# Altium PCB PCB1R.PcbDoc
Units mm, origin at the board's own origin, x right, y up, seen from the top; angles counter-clockwise.
Board outline 32 x 84 mm, 2 copper layers (Top Layer, Bottom Layer); 32 components, 12 nets, 73 pads, 12 vias.
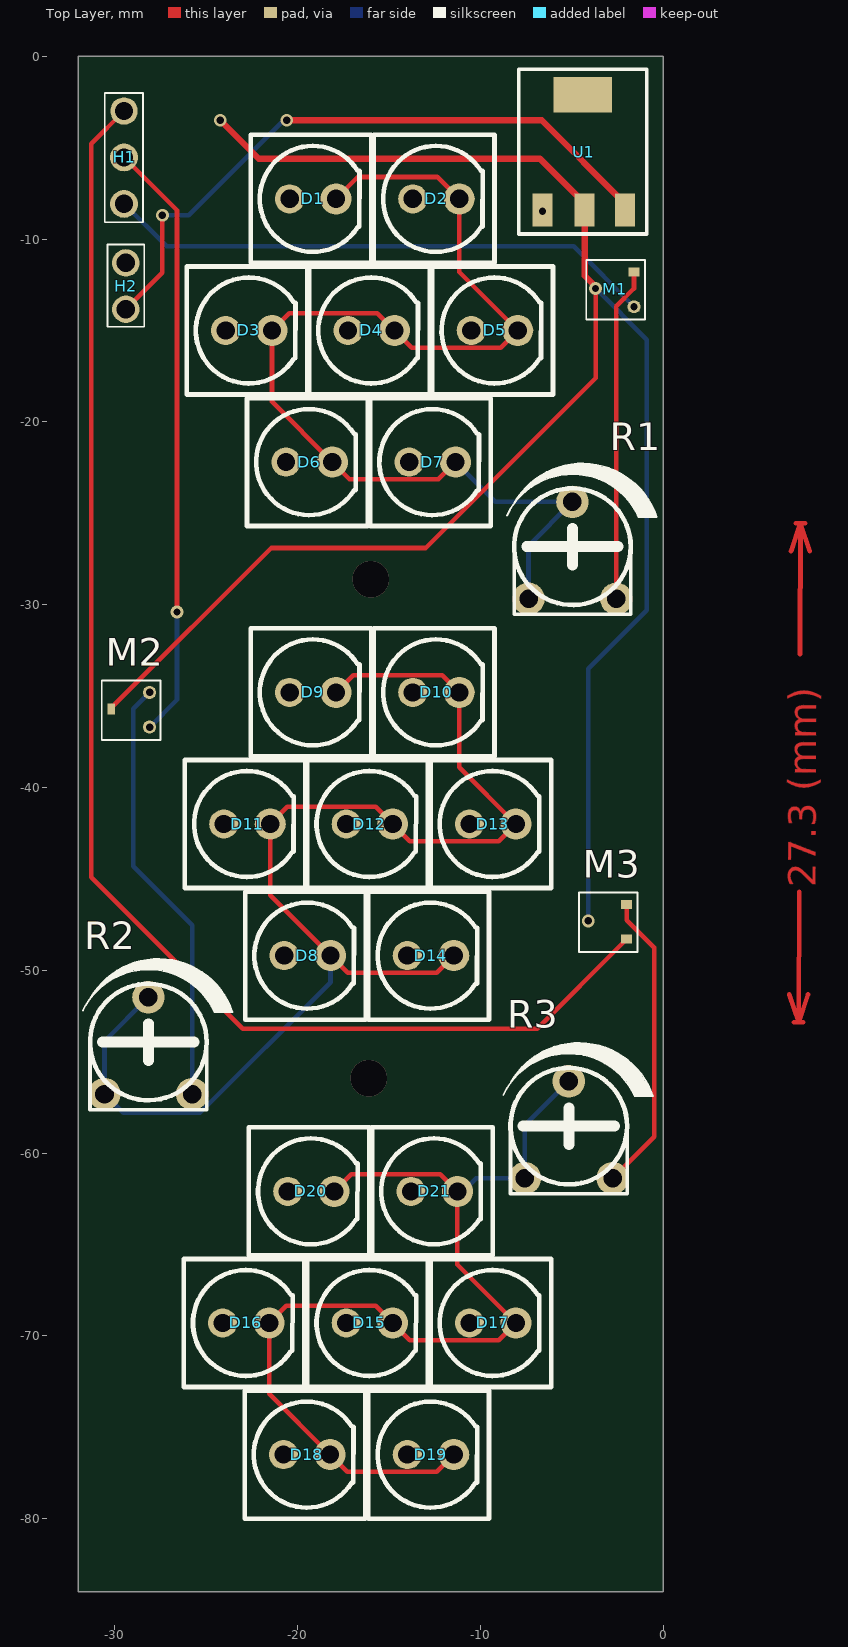
[diagram p0: Top Layer view]
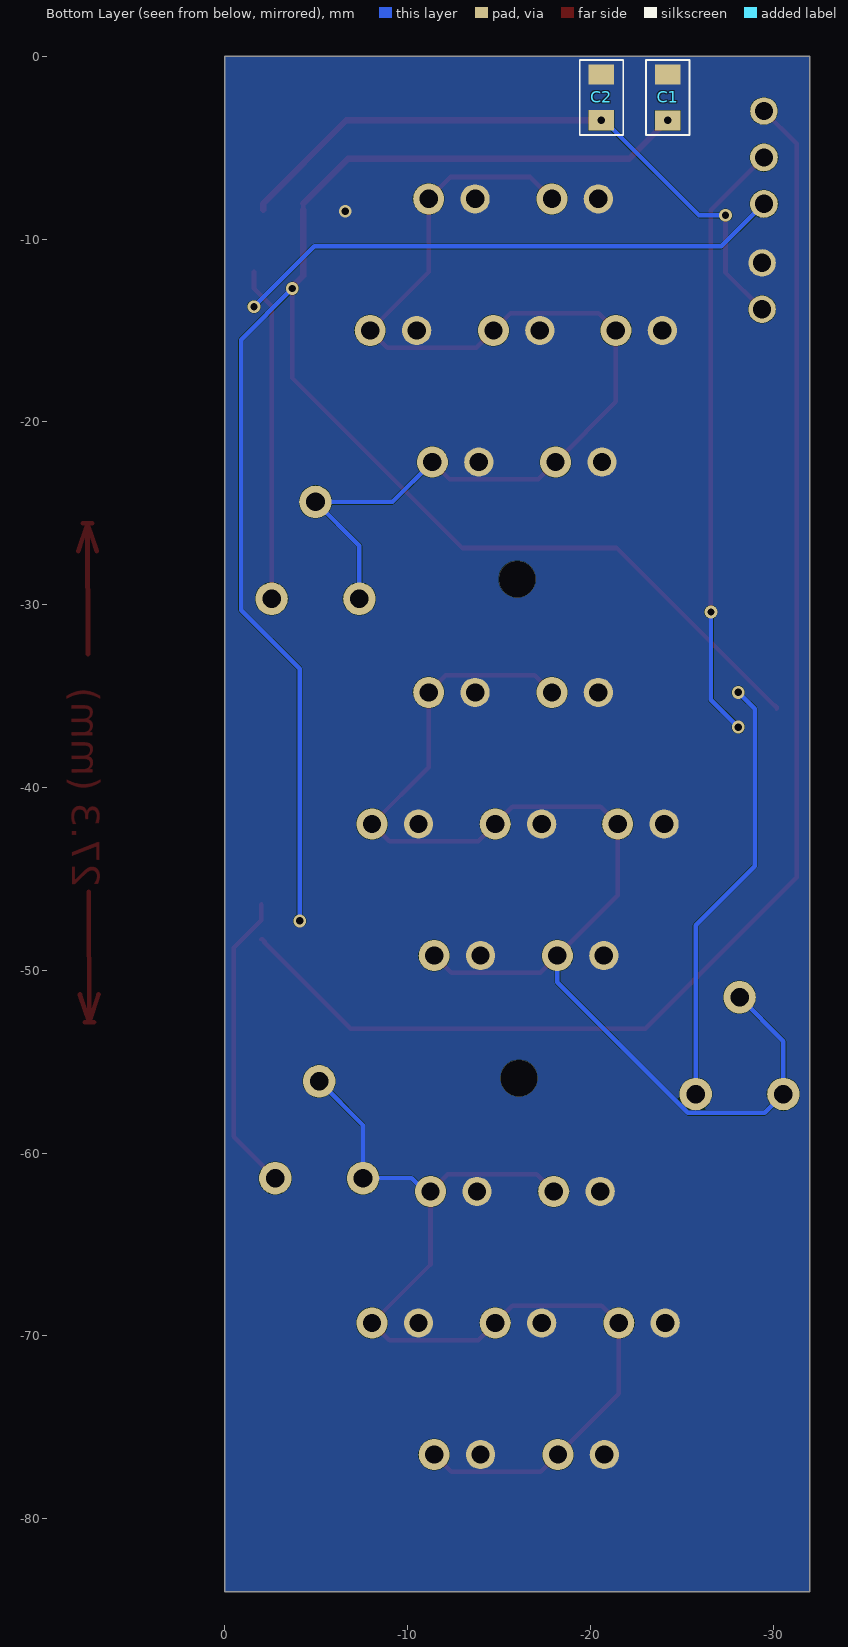
[diagram p1: Bottom Layer view, seen from below]
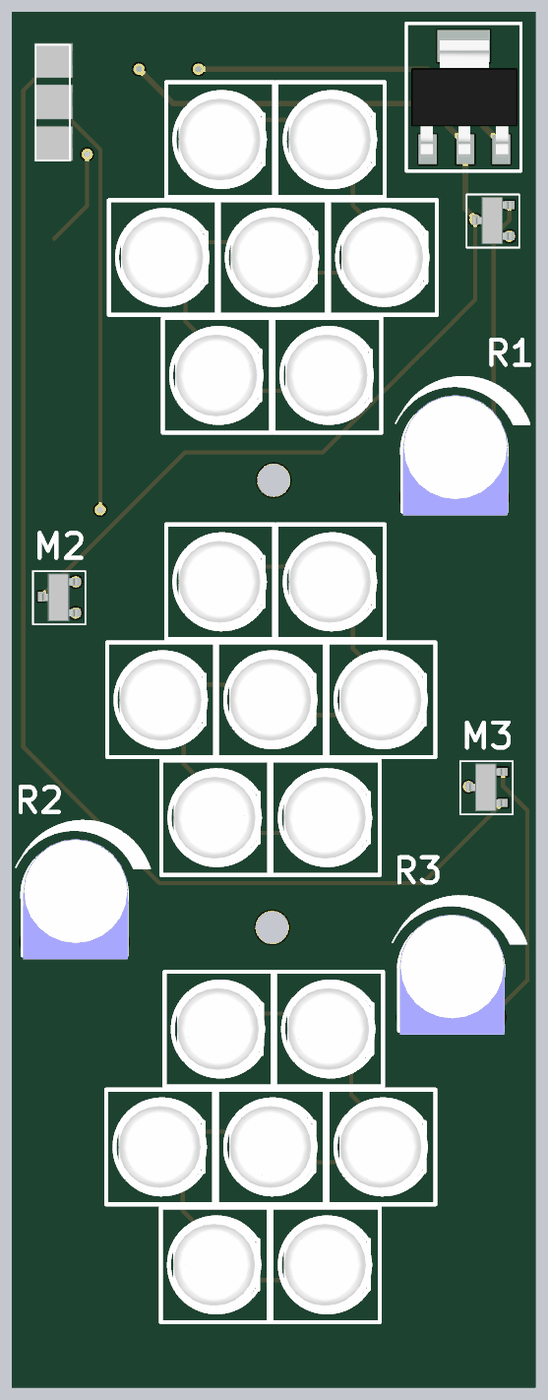
[diagram p2: 3D render of the assembled board from above, using the file's embedded part models]

## Layer stack, top to bottom
Top Solder: solder mask 0.0102, Solder Resist, Dk 3.5
Top Layer: signal copper 0.0356
Dielectric 1: dielectric 0.32, FR-4, Dk 4.8
Bottom Layer: signal copper 0.0356
Bottom Solder: solder mask 0.0102, Solder Resist, Dk 3.5

## Board outline
-32,-84 0,-84 0,0 -32,0

## Design rules (kind name [scope] priority, off if disabled: settings)
Clearance [All] p1: gap=0.01 ignorepadtopadclearanceinfootprint=FALSE
PolygonConnect [All] p1: connectstyle=Direct reliefconductorwidth=0.254 reliefentries=4 polygonreliefangle="90 Angle" airgapwidth=0.254
RoutingVias [All] p1: holewidth=2 width=1.27 viastyle="Through Hole" minholewidth=0.01 minwidth=0.01 maxholewidth=2 maxwidth=2
SilkToSolderMaskClearance [IsPad] p1: minsilkscreentomaskgap=0 clearancetoexposedcopper=TRUE
SolderMaskExpansion [All] p1: expansion=0.102 istentingtop=FALSE
Width [All] p1: maxlimit=0.4 minlimit=0.254 preferedwidth=0.254
29 further rules are at their usual default settings.

## Components (designator, comment, footprint, x,y, rotation, side; value= is the part's Value field where it differs from the comment)
C1 "Capacitor" Capacitor -24.231,-2.303 r270 bottom
C2 "Capacitor" Capacitor -20.6,-2.3 r270 bottom
D1 "LED" LED -19.07,-7.3 r0 top
D2 "LED" LED -12.33,-7.3 r0 top
D3 "LED" LED -22.57,-14.5 r0 top
D4 "LED" LED -15.87,-14.5 r0 top
D5 "LED" LED -9.13,-14.5 r0 top
D6 "LED" LED -19.27,-21.7 r0 top
D7 "LED" LED -12.53,-21.7 r0 top
D8 "LED" LED -19.37,-48.7 r0 top
D9 "LED" LED -19.07,-34.3 r0 top
D10 "LED" LED -12.33,-34.3 r0 top
D11 "LED" LED -22.67,-41.5 r0 top
D12 "LED" LED -15.97,-41.5 r0 top
D13 "LED" LED -9.23,-41.5 r0 top
D14 "LED" LED -12.63,-48.7 r0 top
D15 "LED" LED -15.97,-68.8 r0 top
D16 "LED" LED -22.73,-68.8 r0 top
D17 "LED" LED -9.23,-68.8 r0 top
D18 "LED" LED -19.4,-76 r0 top
D19 "LED" LED -12.63,-76 r0 top
D20 "LED" LED -19.17,-61.6 r0 top
D21 "LED" LED -12.43,-61.6 r0 top
H1 "PinHeader3" "Header x3" -27.8,-3.412 r0 top
H2 "PinHeader2" "Header x2" -193,-98.9 r0 top
M1 "Mosfet" Mosfet -9.9,-11.5 r0 top
M2 "Mosfet" Mosfet -36.4,-34.5 r0 top
M3 "Mosfet" Mosfet -10.3,-46.1 r0 top
R1 "Potetiometer" Potentiometer -4.9,-27.2 r0 top
R2 "Potetiometer" Potentiometer -28.1,-54.3 r0 top
R3 "Potetiometer" Potentiometer -5.1,-58.9 r0 top
U1 "Regulator" SOT-223 -2.1,-2.1 r270 top

## Footprints (in the part's own frame and the unit in brackets; to place one, negate y for a bottom-side part, rotate by r counter-clockwise, add the part's x,y. Pads: shape width x height; smd on the part's side, far side on the other; paste and mask are expansions set on the pad)
Capacitor [mm]
  rect 1.1x1.4 smd: 1(-1.3,0) 2(1.2,0)
  silkscreen extent -2.1,-1.17 2,1.2, body extent -1.1,-0.65 0.9,0.65, height 0.77
"Header x2" [mm]
  round 1.5 hole 1: 1(163.6,87.6) 2(163.6,85.06)
  silkscreen extent 162.59,84.1 164.61,88.6, body extent 162.3,83.76 164.8,88.84, height 5.38
"Header x3" [mm]
  round 1.5 hole 1: 1(-1.7,0.42)
  round 1.524 hole 1: 2(-1.7,-2.12) 3(-1.7,-4.66)
  silkscreen extent -2.75,-5.67 -0.66,1.4, body extent -2.9,-5.91 -0.4,1.71, height 5.8
LED [mm]
  round 1.6 hole 1: 1(-1.37,-0.5)
  round 1.7 hole 1: 2(1.17,-0.5)
  silkscreen extent -3.5,-4 3.1,3, body extent -2.75,-3.4 2.66,2.4, height 7.48
Mosfet [mm]
  rect 0.6x0.5 smd: 1(8.3,-2.2) 3(8.3,-0.3)
  rect 0.4x0.6 smd: 2(6.2,-1.2)
  silkscreen extent 5.68,-2.9 8.9,0.35, body extent 6.1,-2.7 8.4,0.2, height 0.96
Potentiometer [mil]
  round 70 hole 40: 1(-97.13,-97.6) 2(91.85,-97.6) 3(-2.64,111.06)
  silkscreen extent -144,-131 179,194, body extent -126,-140 126,150, height 183
SOT-223 [mm]
  rect 1.8x1.1 smd: 1(6.3,-2.2) 2(6.3,0) 3(6.3,-4.5)
  rect 1.95x3.2 smd: 4(0,-2.3)
  silkscreen extent -1.4,-5.8 7.62,1.2, body extent -0.36,-5.5 6.6,1, height 1.61

## Part data
C1 C2: Parameter 1=1uF

## Via types
v1: diameter 0.7, hole 0.4, Top Layer to Bottom Layer, 10 vias
v2: diameter 2, hole 2, Top Layer to Bottom Layer, 2 vias

## Nets (pads, with @x,y where several pads share a name; then routed paths per layer and width w, separated by ;. In a path a pad name is that pad's centre, name@x,y a point inside that pad or via, vN(x,y) a via of type N, cw(c..) or ccw(c..) an arc to the next point about the centre after c; other vN are vias at no path point)
GND: C1.1 C2.1 D1.1 D2.1 D3.1 D4.1 D5.1 D6.1 D7.1 D8.1 D9.1 D10.1 D11.1 D12.1 D13.1 D14.1 D15.1 D16.1 D17.1 D18.1 D19.1 D20.1 D21.1 H2.1 U1.3 | length 0.1
  Top Layer w0.254: v1(-6.6,-8.477) U1.3
NetC1_2: C1.2 M1.2 M2.2 M3.2 U1.1 | length 102.8
  Top Layer w0.254: M2.2 -30.2,-35.6 -30.127,-35.527 -30.079,-35.527 -21.452,-26.9 -13,-26.9 -3.7,-17.6 v1(-3.7,-12.7) M1.2@-3.7,-12.6 ; U1.1 U1.1@-4.3,-8.05
  Top Layer w0.35: v1(-24.231,-3.503) -22.126,-5.607 -6.743,-5.607 U1.1@-4.3,-8.05 ; U1.1 -4.3,-12 M1.2@-3.7,-12.6
  Bottom Layer w0.254: v1(-4.1,-47.3) -4.1,-33.5 -0.9,-30.3 -0.9,-15.5 v1(-3.7,-12.7)
NetC2_2: C2.2 H2.2 U1.2 | length 35.7
  Top Layer w0.254: H2.2 -27.4,-11.84 v1(-27.4,-8.7)
  Top Layer w0.35: v1(-20.6,-3.5) -6.65,-3.5 -2.1,-8.05 U1.2
  Bottom Layer w0.254: v1(-27.4,-8.7) -25.95,-8.7 -20.75,-3.5 v1(-20.6,-3.5)
NetD1_2: D1.2 D2.2 D3.2 D4.2 D5.2 D6.2 D7.2 R1.1 R1.3 | length 60.9
  Top Layer w0.254: D1.2 -16.7,-6.6 -12.36,-6.6 D2.2 -11.16,-11.8 D5.2 -8.897,-15.937 -13.763,-15.937 D4.2 -15.637,-14.063 -20.463,-14.063 D3.2 -21.4,-18.9 D6.2 -17.163,-23.137 -12.297,-23.137 D7.2
  Bottom Layer w0.254: D7.2 -9.181,-24.379 R1.3 -7.367,-26.779 R1.1
NetD8_2: D8.2 D9.2 D10.2 D11.2 D12.2 D13.2 D14.2 R2.1 R2.3 | length 70.6
  Top Layer w0.254: D9.2 -16.963,-33.863 -12.097,-33.863 D10.2 -11.16,-38.9 D13.2 -8.997,-42.937 -13.863,-42.937 D12.2 -15.737,-41.063 -20.563,-41.063 D11.2 -21.5,-45.9 D8.2 -17.263,-50.137 -12.397,-50.137 D14.2
  Bottom Layer w0.254: R2.3 -30.567,-53.879 R2.1 -29.541,-57.805 -25.342,-57.805 -18.2,-50.663 D8.2
NetD15_2: D15.2 D16.2 D17.2 D18.2 D19.2 D20.2 D21.2 R3.1 R3.3 | length 57.5
  Top Layer w0.254: D20.2 -17.063,-61.163 -12.197,-61.163 D21.2 -11.26,-66.1 D17.2 -8.997,-70.237 -13.863,-70.237 D15.2 -15.737,-68.363 -20.623,-68.363 D16.2 -21.56,-73.17 D18.2 -17.293,-77.437 -12.397,-77.437 D19.2
  Bottom Layer w0.254: D21.2 -10.961,-62.1 -10.24,-61.379 R3.1 -7.567,-58.479 R3.3
NetH1_1: H1.1 M3.1 | length 77.4
  Top Layer w0.254: H1.1 -31.293,-4.785 -31.293,-44.907 -23,-53.2 -6.9,-53.2 -2.173,-48.473 -2.173,-48.423 -2.05,-48.3 M3.1
NetH1_2: H1.2 M2.1 | length 33
  Top Layer w0.254: H1.2 -26.6,-8.432 v1(-26.6,-30.4)
  Bottom Layer w0.254: v1(-28.1,-36.7) -26.6,-35.2 v1(-26.6,-30.4)
NetH1_3: H1.3 M1.1 | length 30.2
  Bottom Layer w0.254: H1.3 -27.172,-10.4 -4.9,-10.4 v1(-1.6,-13.7)
NetM1_3: M1.3 R1.2 | length 18.3
  Top Layer w0.254: R1.2 -2.567,-13.667 -1.6,-12.7 M1.3
NetM2_3: M2.3 R2.2 | length 23.7
  Bottom Layer w0.254: v1(-28.1,-34.8) -29,-35.7 -29,-44.3 -25.767,-47.533 R2.2
NetM3_3: M3.3 R3.2 | length 16.5
  Top Layer w0.254: R3.2 -0.5,-59.112 -0.5,-48.76 -2,-47.26 M3.3
pads on no net: U1.4
copper on no net: | length 21.7
  Top Layer w0.254: 6.904,-51.321 7.407,-52.847 ; 6.993,-27.069 7.507,-25.547 ; 7.153,-52.846 7.661,-52.848 ; 7.253,-25.546 7.761,-25.548 ; 7.433,-45.698 7.407,-52.847 ; 7.481,-32.697 7.507,-25.547 ; 7.92,-51.325 7.407,-52.847 ; 8.009,-27.073 7.507,-25.547
  other v2: -16.1,-55.9 -16,-28.6

## Polygon pours and split planes (outlines as drawn)
GND on Bottom Layer "GND_L02_P002" (solid, pour order 2): -32,0 0,0 0,-84 -32,-84

## Other copper
Top Layer:
  text "27.3 (mm)" at 8.348,-45.447 h1.52 r89.79